# EAGLE board Selectric (EAGLE 7.7.0)
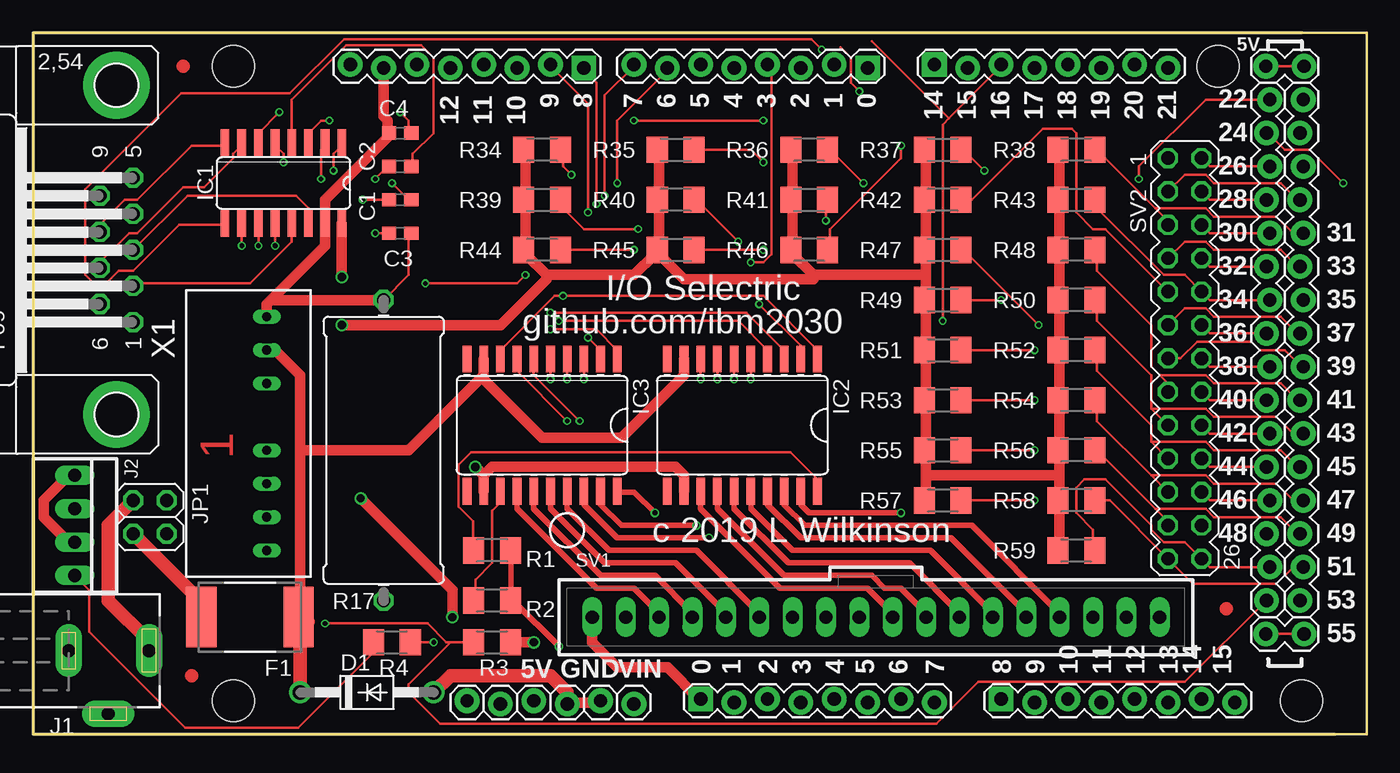
[diagram p0: board, top side]
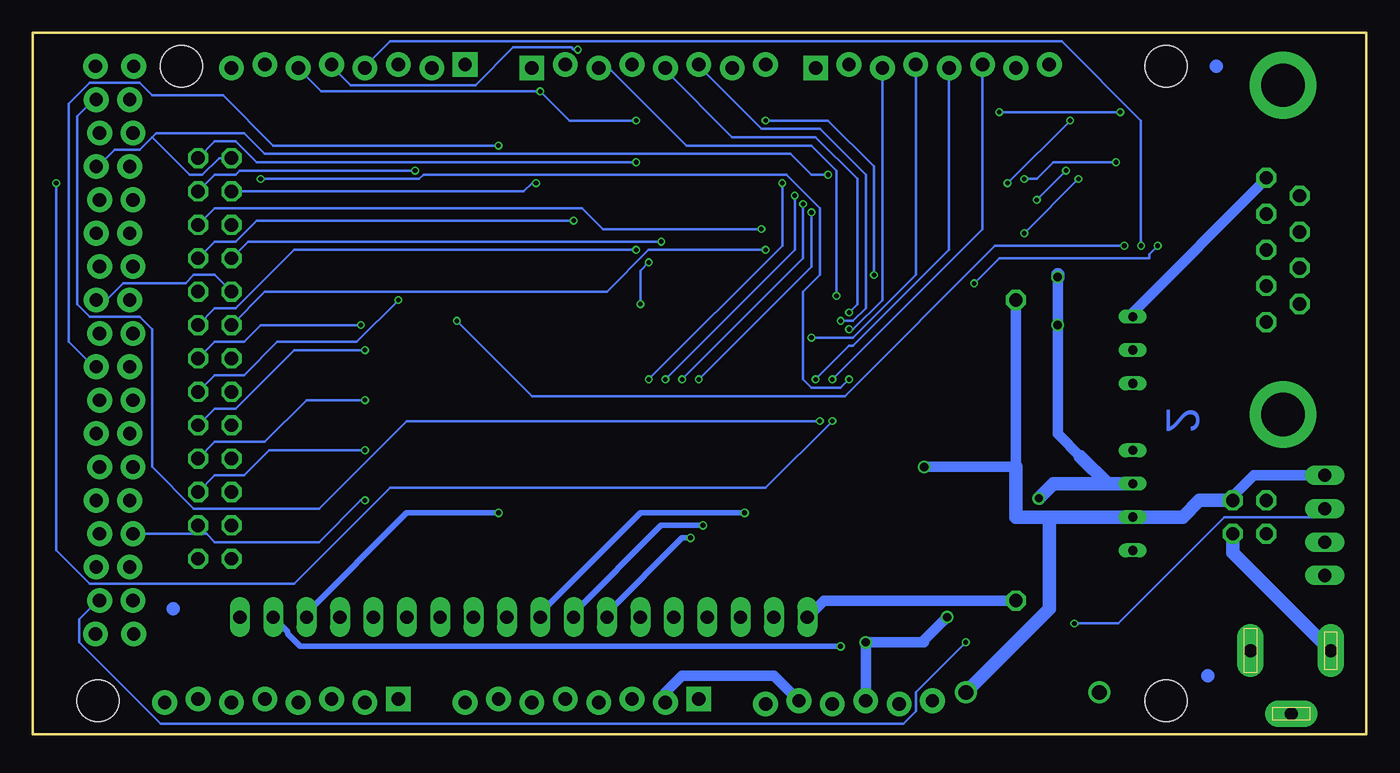
[diagram p1: board, bottom side, seen from below]

Size 101.47 x 53.34 mm. Coordinates in mm from the lower left corner, seen from the top.
Outline: 101.47,53.34 0,53.34 0,0 101.47,0 101.47,53.34
Copper layers (1*16): Top 0.018mm / dielectric 1.55mm / Bottom 0.018mm
Design rules "eC_2Layer_PClass6_BaseCopperO18_eCDefault": minimum track width 0.15mm, minimum drill 0.35mm, track to track 0.15mm, track to pad 0.15mm, pad to pad 0.15mm, via to via 0.15mm, smd to smd 0mil, copper to edge 0.25mm, drill to drill 0.35mm, minimum pad ring 0.175mm, minimum via ring 0.125mm, stop-mask expansion 0mil, vias tented up to drill 0.45mm, thermal gap 0.2mm
Net classes: 0 default: width 0.203 mm, drill 0.254 mm, clearance 0.203 mm; 1 supplyIn: width 0.813 mm, drill 0.635 mm, clearance 0.381 mm; 2 hsd: width 0.406 mm, drill 0.381 mm, clearance 0.381 mm
Holes 3.2 mm at 15.24,50.8 15.24,2.54 90.17,50.8 96.52,2.54
tKeepout: area 12.7,21 to 15.2,24.8
bKeepout: area 12.7,21 to 15.2,24.8

## Footprints (pad centres in the part's own frame; a part is rotated, then mirrored left to right if it is on the bottom)
C0603 = smd 1.1 x 1: 1 -0.85,0; 2 0.85,0
DO41-10 = drill 1.118: A 5.08,0; C -5.08,0
TRACO_SIP-8 = drill 0.7 long: 1 -8.89,0; 2 -6.35,0; 3 -3.81,0; 5 1.27,0; 6 3.81,0; 7 6.35,0; 8 8.89,0
SMD050F = smd 2.3 x 4.6: 1 -3.7,0; 2 3.7,0
SO16 = smd 0.66 x 2.032: 1 -4.445,-3.073; 2 -3.175,-3.073; 3 -1.905,-3.073; 4 -0.635,-3.073; 5 0.635,-3.073; 6 1.905,-3.073; 7 3.175,-3.073; 8 4.445,-3.073; 9 4.445,3.073; 10 3.175,3.073; 11 1.905,3.073; 12 0.635,3.073; 13 -0.635,3.073; 14 -1.905,3.073; 15 -3.175,3.073; 16 -4.445,3.073
SO20W = smd 0.66 x 2.032: 1 -5.715,-5.029; 2 -4.445,-5.029; 3 -3.175,-5.029; 4 -1.905,-5.029; 5 -0.635,-5.029; 6 0.635,-5.029; 7 1.905,-5.029; 8 3.175,-5.029; 9 4.445,-5.029; 10 5.715,-5.029; 11 5.715,5.029; 12 4.445,5.029; 13 3.175,5.029; 14 1.905,5.029; 15 0.635,5.029; 16 -0.635,5.029; 17 -1.905,5.029; 18 -3.175,5.029; 19 -4.445,5.029; 20 -5.715,5.029
DCJ0303 = drill 1 pad 2 long: 1 0,3.1; 2 4.8,0; 3 0,-3
22-23-2041 = drill 1 long: 1 -3.81,0; 2 -1.27,0; 3 1.27,0; 4 3.81,0
2X02 = drill 1.016 octagon: 1 -1.27,-1.27; 2 -1.27,1.27; 3 1.27,-1.27; 4 1.27,1.27
1X08_LOCK = drill 1.016 pad 1.88 square: 1 0,0.127 | drill 1.016 pad 1.88: 2 2.54,-0.127; 3 5.08,0.127; 4 7.62,-0.127; 5 10.16,0.127; 6 12.7,-0.127; 7 15.24,0.127; 8 17.78,-0.127
1X16_LOCK = drill 1.016 pad 1.88: 1 0,0.127; 2 2.54,-0.127; 3 5.08,0.127; 4 7.62,-0.127; 5 10.16,0.127; 6 12.7,-0.127; 7 15.24,0.127; 8 17.78,-0.127; 9 20.32,0.127; 10 22.86,-0.127; 11 25.4,0.127; 12 27.94,-0.127; 13 30.48,0.127; 14 33.02,-0.127; 15 35.56,0.127; 16 38.1,-0.127
1X06_LOCK = drill 1.016 pad 1.88: 1 0,0; 2 2.54,-0.254; 3 5.08,0; 4 7.62,-0.254; 5 10.16,0; 6 12.7,-0.254
1X02_LOCK = drill 1.016 pad 1.88: 1 -0.178,0; 2 2.718,0
M1206 = smd 1.6 x 2: 1 -1.4,0; 2 1.4,0
0922/22 = drill 1.016 octagon: 1 -11.43,0; 2 11.43,0
70543-18 = drill 1.016 long: 1 -21.59,0; 2 -19.05,0; 3 -16.51,0; 4 -13.97,0; 5 -11.43,0; 6 -8.89,0; 7 -6.35,0; 8 -3.81,0; 9 -1.27,0; 10 1.27,0; 11 3.81,0; 12 6.35,0; 13 8.89,0; 14 11.43,0; 15 13.97,0; 16 16.51,0; 17 19.05,0; 18 21.59,0
MA13-2 = drill 1.016 octagon: 1 -15.24,-1.27; 2 -15.24,1.27; 3 -12.7,-1.27; 4 -12.7,1.27; 5 -10.16,-1.27; 6 -10.16,1.27; 7 -7.62,-1.27; 8 -7.62,1.27; 9 -5.08,-1.27; 10 -5.08,1.27; 11 -2.54,-1.27; 12 -2.54,1.27; 13 0,-1.27; 14 0,1.27; 15 2.54,-1.27; 16 2.54,1.27; 17 5.08,-1.27; 18 5.08,1.27; 19 7.62,-1.27; 20 7.62,1.27; 21 10.16,-1.27; 22 10.16,1.27; 23 12.7,-1.27; 24 12.7,1.27; 25 15.24,-1.27; 26 15.24,1.27
F09HP = drill 1.016 octagon: 1 -5.486,-1.27; 2 -2.743,-1.27; 3 0,-1.27; 4 2.743,-1.27; 5 5.486,-1.27; 6 -4.115,1.27; 7 -1.372,1.27; 8 1.372,1.27; 9 4.115,1.27 | drill 3.302 pad 5.08: G1 -12.522,0; G2 12.522,0

## Placement (x,y rotation side)
C1  100n  [C0603]  27.94,40.64 0 top
C2  100n  [C0603]  27.94,43.18 180 top
C3  100n  [C0603]  27.94,38.1 0 top
C4  100n  [C0603]  27.94,45.72 180 top
D1  1N4004  [DO41-10]  25.4,3.17 0 top
DC1  TMR  [TRACO_SIP-8]  17.78,22.86 270 top
F1  SMD100F  [SMD050F]  16.51,8.89 0 top
IC1  MAX3232ESE  [SO16]  19.05,41.91 180 top
IC2  UDN2982SLW  [SO20W]  53.98,23.5 180 top
IC3  UDN2982SLW  [SO20W]  38.73,23.5 180 top
J1  [DCJ0303]  5.71,6.35 270 top
J2  22-23-2041  [22-23-2041]  3.17,15.88 270 top
JP1  [2X02]  8.89,16.51 270 top
JP3  [1X08_LOCK]  41.91,50.8 180 top
JP4  [1X08_LOCK]  63.5,50.8 180 top
JP5  [1X08_LOCK]  68.58,50.8 0 top
JP6  [1X08_LOCK]  73.66,2.54 0 top
JP7  [1X08_LOCK]  50.8,2.54 0 top
JP8  M16LOCK  [1X16_LOCK]  96.52,10.16 90 top
JP9  M16LOCK  [1X16_LOCK]  93.98,48.26 270 top
JP10  [1X06_LOCK]  33.02,2.54 0 top
JP11  [1X02_LOCK]  93.98,7.62 0 top
JP12  [1X02_LOCK]  93.98,50.8 0 top
R1  10R  [M1206]  34.92,13.97 0 top
R2  10R  [M1206]  34.92,10.16 0 top
R3  220R  [M1206]  34.92,6.99 180 top
R4  220R  [M1206]  27.3,6.99 180 top
R17  1R0  [0922/22]  26.67,21.59 270 top
R34  220R  [M1206]  38.73,44.45 0 top
R35  220R  [M1206]  48.9,44.45 180 top
R36  220R  [M1206]  59.05,44.45 0 top
R37  220R  [M1206]  69.22,44.45 180 top
R38  220R  [M1206]  79.38,44.45 0 top
R39  220R  [M1206]  38.73,40.64 180 top
R40  220R  [M1206]  48.9,40.64 0 top
R41  220R  [M1206]  59.05,40.64 180 top
R42  220R  [M1206]  69.22,40.64 0 top
R43  220R  [M1206]  79.38,40.64 180 top
R44  220R  [M1206]  38.73,36.83 0 top
R45  220R  [M1206]  48.9,36.83 180 top
R46  220R  [M1206]  59.05,36.83 0 top
R47  220R  [M1206]  69.22,36.83 180 top
R48  220R  [M1206]  79.38,36.83 0 top
R49  220R  [M1206]  69.22,33.02 180 top
R50  220R  [M1206]  79.38,33.02 0 top
R51  220R  [M1206]  69.22,29.21 180 top
R52  220R  [M1206]  79.38,29.21 0 top
R53  220R  [M1206]  69.22,25.4 180 top
R54  220R  [M1206]  79.38,25.4 0 top
R55  220R  [M1206]  69.22,21.59 180 top
R56  220R  [M1206]  79.38,21.59 0 top
R57  220R  [M1206]  69.22,17.78 180 top
R58  220R  [M1206]  79.38,17.78 0 top
R59  220R  [M1206]  79.38,13.97 180 top
SV1  C-GRID-18-70543  [70543-18]  64.14,8.89 180 top
SV2  [MA13-2]  87.63,28.57 270 top
U$1  [CIRCLE-1MM-3R]  12.06,4.45 0 top
U$2  [CIRCLE-1MM-3R]  90.81,9.53 0 top
U$3  [CIRCLE-1MM-3R]  11.43,50.8 0 top
X1  [F09HP]  6.35,36.83 90 top

## Library data of the parts
C1-C4 R1-R4 R17 R34-R59 = rcl
D1 = diode
DC1 = traco_tmr
F1 = switch-raychem
IC1 = maxim; MF: MAXIM; MPN: MAX3232ESE; OC_FARNELL: 9725539; OC_NEWARK: 79C3880
IC2 IC3 = uln-udn
J1 = con-jack; OC_FARNELL: unknown; OC_NEWARK: unknown
J2 = con-molex; MF: MOLEX; MPN: 22-23-2041; OC_FARNELL: 1462920; OC_NEWARK: 38C0355
JP1 = pinhead
JP3-JP12 = SparkFun
SV1 = con-molex; OC_FARNELL: unknown; OC_NEWARK: unknown
SV2 = con-lstb; OC_FARNELL: unknown; OC_NEWARK: unknown
U$1-U$3 = fiducial
X1 = con-subd; OC_FARNELL: unknown; OC_NEWARK: unknown

## Nets
3.3: JP10.2
5V@1: JP12.1 JP12.2
A2: JP7.3
A3: JP7.4
A4: JP7.5
A5: JP7.6
A6: JP7.7
A7: JP7.8
A8: JP6.1
A9: JP6.2
A10: JP6.3
A11: JP6.4
A12: JP6.5
A13: JP6.6
A14: JP6.7
A15: JP6.8
AREF: JP3.8
CTS: IC1.8 X1.8
D2: IC2.1 IC3.8 JP4.3
D3: IC2.2 JP4.4
D4: IC2.3 JP4.5
D5: IC2.4 JP4.6
D6: IC2.5 JP4.7
D7: IC2.6 JP4.8
D8: IC2.7 JP3.1
D9: IC2.8 JP3.2
D10: IC3.1 JP3.3
D11: IC3.2 JP3.4
D12: IC3.3 JP3.5
D13: IC3.4 JP3.6
D14: JP5.8
D15: JP5.7
D22: IC3.5 JP9.1
D23: IC3.6 JP8.16
D24: IC3.7 JP9.2
D25: JP8.15
D26: JP9.3 R35.1 SV2.2
D27: JP8.14 R34.2 SV2.1
D28: JP9.4 R37.1 SV2.4
D29: JP8.13 R36.2 SV2.3
D30: JP9.5 R39.1 SV2.6
D31: JP8.12 R38.2 SV2.5
D32: JP9.6 R41.1 SV2.8
D33: JP8.11 R40.2 SV2.7
D34: JP9.7 R43.1 SV2.10
D35: JP8.10 R42.2 SV2.9
D36: JP9.8 R45.1 SV2.12
D37: JP8.9 R44.2 SV2.11
D38: JP9.9 R47.1 SV2.14
D39: JP8.8 R46.2 SV2.13
D40: JP9.10 R49.1 SV2.16
D41: JP8.7 R48.2 SV2.15
D42: JP9.11 R51.1 SV2.18
D43: JP8.6 R50.2 SV2.17
D44: JP9.12 R53.1 SV2.20
D45: JP8.5 R52.2 SV2.19
D46: JP9.13 R55.1 SV2.22
D47: JP8.4 R54.2 SV2.21
D48: JP9.14 R57.1 SV2.24
D49: JP8.3 R56.2 SV2.23
D50: JP9.15 R59.1 SV2.26
D51: JP8.2 R58.2 SV2.25
D52: J2.2 JP9.16 R3.2
D53: JP8.1 R4.1
GND [supplyIn]: C3.2 C4.2 D1.A DC1.1 DC1.7 IC1.15 IC2.12 IC3.12 J2.1 J2.3 JP1.2 JP3.7 JP7.2 JP10.4 JP10.5 R17.1 X1.5
HSD1 [hsd]: R1.2 R2.2 SV1.2
HSD2 [hsd]: IC2.19 SV1.3
HSD3 [hsd]: IC2.18 SV1.4
HSD4 [hsd]: IC2.17 SV1.5
HSD5 [hsd]: IC2.16 SV1.6
HSD6 [hsd]: IC2.15 SV1.7
HSD7 [hsd]: IC2.14 SV1.8
HSD8 [hsd]: IC2.13 SV1.9
HSD9 [hsd]: IC3.20 SV1.10
HSD10 [hsd]: IC3.19 SV1.11
HSD11 [hsd]: IC3.18 SV1.12
HSD12 [hsd]: IC3.17 SV1.13
HSD13 [hsd]: IC3.16 SV1.14
HSD14 [hsd]: IC3.15 SV1.15
HSD15 [hsd]: IC3.14 SV1.16
HSD16 [hsd]: SV1.17
HSDCOM [supplyIn]: D1.C DC1.2 F1.2 IC2.9 IC3.9
HSDRET [supplyIn]: JP7.1 R17.2 SV1.18
IN_GND: JP11.1 JP11.2
LED+: J2.4 R4.2
N$1: C1.1 IC1.1
N$2: C2.1 IC1.4
N$3: C1.2 IC1.3
N$4: C2.2 IC1.5
N$5: IC3.13 R2.1
N$6: C3.1 IC1.2
N$7: C4.1 IC1.6
N$8: IC2.20 R1.1
N$23 [supplyIn]: J1.3 JP1.4
N$24 [supplyIn]: J1.1 JP1.1
N$42 [supplyIn]: F1.1 JP1.3
RES: JP10.1
RTS: IC1.7 X1.7
RX0: JP4.1
RX1: IC1.12 JP5.3
RX2: IC1.9 JP5.5
RXD: IC1.13 X1.2
SCL: JP5.1
SDA: JP5.2
TX0: JP4.2
TX1: IC1.11 JP5.4
TX2: IC1.10 JP5.6
TXD: IC1.14 X1.3
VCC [supplyIn]: DC1.6 IC1.16 JP10.3 R3.1 R34.1 R35.2 R36.1 R37.2 R38.1 R39.2 R40.1 R41.2 R42.1 R43.2 R44.1 R45.2 R46.1 R47.2 R48.1 R49.2 R50.1 R51.2 R52.1 R53.2 R54.1 R55.2 R56.1 R57.2 R58.1 R59.2
VIN: JP10.6

## Tracks (layer width: path | path; a pad name or v marks a point on that pad's centre or on a via)
5V@1
  Top 0.203: JP12.2 JP12.1
CTS
  Top 0.203: X1.8 5.08,38.73 6.99,40.64 7.94,40.64 12.06,44.77 14.61,44.77 IC1.8
D2  (via drill 0.35)
  Top 0.203: IC3.8 35.56,29.21 39.69,33.34 v40.32,33.34 55.56,33.34 59.69,29.21 IC2.1
  Bottom 0.203: v40.32,33.34 40.32,42.86 42.23,44.77 51.75,44.77 57.47,50.48 58.42,50.48 JP4.3
D3  (via drill 0.35)
  Top 0.203: IC2.2 58.42,29.53 v55.24,32.7 | v54.61,35.88 55.56,35.88 56.2,36.51 56.2,50.48 55.88,50.8 JP4.4
  Bottom 0.203: v55.24,32.7 55.24,35.24 v54.61,35.88
D4  (via drill 0.35)
  Top 0.203: IC2.3 57.15,29.21 54.29,32.07 v39.37,32.07
  Bottom 0.203: v39.37,32.07 38.73,32.7 38.73,42.23 41.91,45.4 48.26,45.4 53.34,50.48 JP4.5
D5  (via drill 0.35)
  Top 0.203: IC2.4 55.88,29.21 53.66,31.43 v40.01,31.43
  Bottom 0.203: v40.01,31.43 39.05,31.43 38.1,32.38 38.1,42.55 41.59,46.04 46.04,46.04 50.8,50.8 JP4.6
D6  (via drill 0.35)
  Top 0.203: v54.61,26.99 IC2.5 | v44.45,41.91 44.45,46.67 48.26,50.48 JP4.7
  Bottom 0.203: v54.61,26.99 44.45,37.15 v44.45,41.91
D7  (via drill 0.35)
  Top 0.203: v43.5,40.96 43.5,48.58 45.72,50.8 JP4.8 | v53.34,26.99 IC2.6
  Bottom 0.203: v53.34,26.99 43.5,36.83 v43.5,40.96
D8  (via drill 0.35)
  Top 0.203: v52.07,26.99 IC2.7 | v42.86,40.32 42.86,49.53 41.91,50.48 JP3.1
  Bottom 0.203: v52.07,26.99 42.86,36.2 v42.86,40.32
D9  (via drill 0.35)
  Top 0.203: v50.8,26.99 IC2.8 | v42.23,39.69 42.23,47.94 39.37,50.8 JP3.2
  Bottom 0.203: v50.8,26.99 42.23,35.56 v42.23,39.69
D10  (via drill 0.35)
  Top 0.203: IC3.1 44.45,29.21 42.86,30.8 v39.37,30.8
  Bottom 0.203: v39.37,30.8 39.05,30.8 36.83,33.02 JP3.3
D11  (via drill 0.35)
  Top 0.203: IC3.2 43.18,29.21 v42.23,30.16
  Bottom 0.203: v42.23,30.16 39.05,30.16 34.29,34.92 JP3.4
D12  (via drill 0.35)
  Top 0.203: v41.91,26.99 IC3.3
  Bottom 0.203: v41.91,26.99 39.37,29.53 39.05,29.53 31.75,36.83 JP3.5
D13  (via drill 0.35)
  Top 0.203: v40.64,26.99 IC3.4
  Bottom 0.203: v40.64,26.99 29.21,38.42 JP3.6
D22  (via drill 0.35)
  Top 0.203: v39.37,26.99 IC3.5 | v84.14,42.23 84.14,43.18 89.22,48.26 JP9.1
  Bottom 0.203: v39.37,26.99 40.01,26.35 42.23,26.35 42.86,26.99 42.86,33.66 41.59,34.92 41.59,40.01 44.13,42.55 71.75,42.55 72.07,42.23 v84.14,42.23
D23  (via drill 0.35)
  Top 0.203: IC3.6 38.1,27.3 v41.59,23.81
  Bottom 0.203: v41.59,23.81 73.03,23.81 79.69,17.14 89.22,17.14 92.39,20.32 92.39,30.8 93.34,31.75 97.16,31.75 98.11,32.7 98.11,46.99 96.84,48.26 JP8.16
D24  (via drill 0.35)
  Top 0.203: IC3.7 36.83,27.62 v40.64,23.81 | v99.69,41.91 97.16,44.45 95.25,44.45 93.98,45.72 JP9.2
  Bottom 0.203: v40.64,23.81 45.72,18.73 74.3,18.73 81.6,11.43 97.16,11.43 99.69,13.97 v99.69,41.91
D26  (via drill 0.35)
  Top 0.203: R35.1 54.61,44.45 v55.56,43.5 | JP9.3 89.53,43.18 SV2.2
  Bottom 0.203: v55.56,43.5 84.45,43.5 86.04,45.09 87.63,45.09 SV2.2
D27  (via drill 0.35)
  Top 0.203: v40.96,42.55 40.32,43.18 40.32,44.45 R34.2
  Bottom 0.203: v40.96,42.55 42.23,42.55 43.81,44.13 83.82,44.13 85.41,45.72 92.08,45.72 92.39,45.4 | 92.39,45.4 93.34,44.45 95.25,44.45 96.52,43.18 JP8.14 | SV2.1 87.31,43.81 88.58,42.55 89.53,42.55 92.39,45.4
D28  (via drill 0.35)
  Top 0.203: v72.39,42.86 70.8,44.45 R37.1 | JP9.4 89.53,40.64 SV2.4
  Bottom 0.203: v72.39,42.86 85.72,42.86 86.04,42.55 87.63,42.55 SV2.4
D29  (via drill 0.35)
  Top 0.203: v63.18,41.91 60.64,44.45 R36.2 | SV2.3 87.63,42.55 89.22,42.55 89.85,41.91 94.93,41.91 96.2,40.64 JP8.13
  Bottom 0.203: v63.18,41.91 63.5,41.91 64.14,41.27 SV2.3
D30  (via drill 0.35)
  Top 0.203: v46.04,38.42 41.91,38.42 40.32,40.01 40.32,40.64 R39.1 | JP9.5 89.53,38.1 SV2.6
  Bottom 0.203: v46.04,38.42 58.1,38.42 59.69,40.01 87.63,40.01 SV2.6
D31
  Top 0.203: 85.41,40.01 86.36,39.05 SV2.5 | 85.41,40.01 80.96,44.45 R38.2 | JP8.12 95.89,38.1 94.61,39.37 89.85,39.37 89.22,40.01 85.41,40.01
D32  (via drill 0.35)
  Top 0.203: v60.33,39.05 60.33,40.64 R41.1 | JP9.6 89.53,35.56 SV2.8
  Bottom 0.203: v60.33,39.05 84.45,39.05 86.04,37.47 87.63,37.47 SV2.8
D33  (via drill 0.35)
  Top 0.203: v53.66,37.47 50.48,40.64 R40.2 | SV2.7 87.63,37.47 89.22,37.47 89.85,36.83 94.93,36.83 96.2,35.56 JP8.11
  Bottom 0.203: v53.66,37.47 85.09,37.47 SV2.7
D34
  Top 0.203: R43.1 80.96,40.64 80.96,40.01 86.04,34.92 87.63,34.92 SV2.10 89.53,33.02 JP9.7
D35
  Top 0.203: R42.2 71.44,40.64 76.83,46.04 79.06,46.04 79.38,45.72 79.38,39.69 80.64,38.42 81.6,38.42 SV2.9
  Bottom 0.203: JP8.10 95.89,33.02 94.61,34.29 89.85,34.29 89.22,34.92 87.63,34.92 SV2.9
D36  (via drill 0.35)
  Top 0.203: v55.56,36.83 R45.1 | JP9.8 89.53,30.48 SV2.12
  Bottom 0.203: v55.56,36.83 81.6,36.83 86.04,32.38 87.63,32.38 SV2.12
D37  (via drill 0.35)
  Top 0.203: v45.72,36.83 R44.2 | SV2.11 87.63,32.38 89.22,32.38 89.85,31.75 94.93,31.75 96.2,30.48 JP8.9
  Bottom 0.203: v45.72,36.83 54.61,36.83 57.78,33.66 83.82,33.66 SV2.11
D38  (via drill 0.35)
  Top 0.203: v76.52,31.11 70.8,36.83 R47.1 | JP9.9 89.53,27.94 SV2.14
  Bottom 0.203: v76.52,31.11 84.14,31.11 85.41,29.84 87.63,29.84 SV2.14
D39  (via drill 0.35)
  Top 0.203: v66.04,44.77 66.04,43.81 60.64,38.42 60.64,36.83 R46.2 | SV2.13 87.31,28.57 88.58,29.84 92.71,29.84 93.34,29.21 95.25,29.21 96.52,27.94 JP8.8
  Bottom 0.203: v66.04,44.77 83.19,44.77 87,48.58 92.39,48.58 93.34,49.53 97.16,49.53 98.74,47.94 98.74,29.84 96.84,27.94 JP8.8
D40  (via drill 0.35)
  Top 0.203: v73.66,33.02 R49.1 | JP9.10 89.53,25.4 SV2.16
  Bottom 0.203: v73.66,33.02 76.83,29.84 82.87,29.84 85.41,27.3 87.63,27.3 SV2.16
D41
  Top 0.203: 85.72,27.3 86.36,26.67 SV2.15 | 85.72,27.3 85.09,27.94 85.09,31.11 80.96,35.24 80.96,36.83 R48.2 | 85.72,27.3 89.22,27.3 89.85,26.67 94.93,26.67 96.2,25.4 JP8.7
D42  (via drill 0.35)
  Top 0.203: v76.2,29.21 R51.1 | JP9.11 89.53,22.86 SV2.18
  Bottom 0.203: v76.2,29.21 81.6,29.21 86.04,24.77 87.63,24.77 SV2.18
D43
  Top 0.203: 85.09,24.77 85.09,27.3 80.96,31.43 80.96,33.02 R50.2 | SV2.17 85.09,24.77 | JP8.6 95.89,22.86 94.61,24.13 89.85,24.13 89.22,24.77 85.09,24.77
D44  (via drill 0.35)
  Top 0.203: v76.2,25.4 R53.1 | JP9.12 89.53,20.32 SV2.20
  Bottom 0.203: v76.2,25.4 80.64,25.4 83.82,22.23 87.63,22.23 SV2.20
D45
  Top 0.203: 85.09,22.23 85.09,23.5 80.96,27.62 80.96,29.21 R52.2 | SV2.19 85.09,22.23 | 85.09,22.23 89.22,22.23 89.85,21.59 94.93,21.59 96.2,20.32 JP8.5
D46  (via drill 0.35)
  Top 0.203: v76.2,21.59 R55.1 | JP9.13 89.53,17.78 SV2.22
  Bottom 0.203: v76.2,21.59 83.5,21.59 85.41,19.68 87.63,19.68 SV2.22
D47
  Top 0.203: SV2.21 85.09,19.68 | 85.09,19.68 80.96,23.81 80.96,25.4 R54.2 | JP8.4 95.89,17.78 94.61,19.05 89.85,19.05 89.22,19.68 85.09,19.68
D48  (via drill 0.35)
  Top 0.203: v76.2,17.78 R57.1
  Bottom 0.203: v76.2,17.78 76.52,17.78 79.69,14.61 87.63,14.61 88.27,15.24 | SV2.24 88.27,15.24 | 88.27,15.24 JP9.14
D49
  Top 0.203: 85.41,17.14 86.36,16.19 SV2.23 | 85.41,17.14 80.96,21.59 R56.2 | 85.41,17.14 89.22,17.14 89.85,16.51 94.93,16.51 96.2,15.24 JP8.3
D50
  Top 0.203: R59.1 80.64,13.97 80.64,15.56 79.38,16.83 79.38,18.73 80.01,19.37 81.6,19.37 85.09,15.88 85.09,15.56 86.04,14.61 87.63,14.61 SV2.26 89.53,12.7 JP9.15
D51
  Top 0.203: R58.2 81.92,17.78 SV2.25 88.27,11.43 94.61,11.43 95.89,12.7 JP8.2
D52  (via drill 0.35)
  Top 0.203: 31.75,6.99 31.43,6.99 30,8.41 v22.23,8.41 | 31.75,6.99 R3.2 | JP9.16 93.82,10.16 87.63,3.97 71.91,3.97 68.74,0.79 30.96,0.79 28.57,3.17 28.57,3.81 31.75,6.99
  Bottom 0.203: v22.23,8.41 18.89,8.41 10.79,16.51 3.81,16.51 J2.2
D53  (via drill 0.35)
  Top 0.203: v30.48,6.99 R4.1
  Bottom 0.203: v30.48,6.99 34.29,3.17 34.29,1.75 35.24,0.79 91.76,0.79 97.95,6.99 97.95,8.73 96.52,10.16 JP8.1
GND  (via drill 0.64)
  Top 0.203: C3.2 28.57,37.88 28.57,34.92 R17.1
  Top 0.813: 17.78,31.8 DC1.1 17.78,32.7 18.26,33.18 | JP10.5 43.02,2.38 40.64,2.38 JP10.4 | 34.29,19.68 IC3.12 | 34.29,19.68 34.92,20.32 48.9,20.32 49.53,19.68 IC2.12 | 34.29,19.68 v33.66,20.32 | JP3.7 26.67,46.99 26.99,46.67 26.99,45.72 C4.2 26.99,45.4 22.23,40.64 IC1.15 22.23,37.15 18.26,33.18 | R17.1 18.41,33.02 18.26,33.18 | J2.3 2.7,14.61 0.79,16.51 0.79,17.78 2.7,19.68 J2.1
  Top 1.016: 40.64,2.38 40.64,3.17 39.37,4.45 31.75,4.45 D1.A
  Bottom 0.813: JP7.2 53.34,3.17 52.07,4.45 45.09,4.45 JP10.5 | v33.66,20.32 26.67,20.32 R17.1 | DC1.1 17.78,32.07 7.62,42.23 X1.5 | J2.1 8.57,19.68 10.32,17.94 JP1.2
  Bottom 1.016: 26.67,20.32 26.67,16.51 24.13,16.51 | 24.13,16.51 DC1.7 13.97,16.51 12.7,17.78 JP1.2 | D1.A 24.13,9.53 24.13,16.51
HSD1  (via drill 0.38)
  Top 0.406: R1.2 36.35,13.97 36.35,10.16 R2.2 36.51,10.16 v40.01,6.67
  Bottom 0.406: SV1.2 82.07,7.78 82.07,7.62 81.12,6.67 v40.01,6.67
HSD2  (via drill 0.38)
  Top 0.406: IC2.19 58.42,17.46 59.05,16.83 v66.04,16.83
  Bottom 0.406: v66.04,16.83 73.03,16.83 80.64,9.21 SV1.3
HSD3
  Top 0.406: IC2.18 57.15,17.46 58.74,15.88 71.44,15.88 78.11,9.21 SV1.4
HSD4
  Top 0.406: IC2.17 55.88,17.46 58.42,14.92 69.85,14.92 75.56,9.21 SV1.5
HSD5
  Top 0.406: IC2.16 54.61,17.14 57.78,13.97 68.26,13.97 73.03,9.21 SV1.6
HSD6
  Top 0.406: IC2.15 53.34,17.14 57.47,13.02 66.67,13.02 70.48,9.21 SV1.7
HSD7
  Top 0.406: IC2.14 52.07,17.14 57.15,12.06 63.82,12.06 64.77,11.11 66.04,11.11 67.94,9.21 SV1.8
HSD8
  Top 0.406: IC2.13 50.8,17.14 56.83,11.11 63.5,11.11 65.41,9.21 SV1.9
HSD9  (via drill 0.38)
  Top 0.406: v47.31,16.83 45.72,18.41 44.45,18.41 IC3.20
  Bottom 0.406: v47.31,16.83 55.24,16.83 62.87,9.21 SV1.10
HSD10  (via drill 0.38)
  Top 0.406: IC3.19 43.18,17.46 44.77,15.88 v50.48,15.88
  Bottom 0.406: v50.48,15.88 53.66,15.88 60.33,9.21 SV1.11
HSD11  (via drill 0.38)
  Top 0.406: IC3.18 41.91,17.46 44.45,14.92 v51.44,14.92
  Bottom 0.406: v51.44,14.92 52.07,14.92 57.78,9.21 SV1.12
HSD12
  Top 0.406: IC3.17 40.64,17.14 43.81,13.97 50.48,13.97 55.24,9.21 SV1.13
HSD13
  Top 0.406: 52.7,9.05 SV1.14 52.7,9.21 48.9,13.02 43.5,13.02 39.37,17.14 IC3.16
HSD14
  Top 0.406: 50.16,9.05 SV1.15 50.16,9.21 47.31,12.06 43.18,12.06 38.1,17.14 IC3.15
HSD15
  Top 0.406: 47.62,9.05 SV1.16 47.62,9.21 45.72,11.11 42.86,11.11 36.83,17.14 IC3.14
HSDCOM
  Top 0.813: F1.2 20.32,8.89 20.32,8.26 F1.2 | 20.69,8.46 F1.2 | 21.03,8.53 F1.2 | 20.32,21.59 20.32,27.3 18.41,29.21 17.72,29.15 17.83,29.15 DC1.2 | 20.32,21.59 20.32,9 F1.2 | 34.29,27.3 34.29,26.99 38.73,22.54 44.77,22.54 49.53,27.3 IC2.9 | 34.29,27.3 IC3.9 | 34.29,27.3 28.57,21.59 20.32,21.59
  Top 1.016: 20.32,8.26 D1.C
HSDRET
  Top 0.813: JP7.1 50.67,2.67 48.26,5.08 44.45,5.08 42.55,6.99 SV1.18
  Bottom 0.813: R17.2 41.27,10.16 SV1.18
IN_GND
  Top 0.203: JP11.2 JP11.1
LED+
  Top 0.203: J2.4 4.29,10.95 4.29,7.78 11.59,0.48 20.16,0.48 25.88,6.19 25.88,6.99 R4.2
N$1  (via drill 0.35)
  Top 0.203: v25.08,40.64 C1.1 | v22.86,42.86 22.86,44.13 23.5,44.77 IC1.1
  Bottom 0.203: v22.86,42.86 v25.08,40.64
N$2
  Top 0.203: IC1.4 19.68,48.26 23.81,52.39 29.53,52.39 30.48,51.44 30.48,45.72 28.89,44.13 28.89,43.18 C2.1
N$3  (via drill 0.35)
  Top 0.203: v27.3,41.91 28.57,40.64 C1.2 | v22.54,46.67 21.91,46.67 20.95,45.72 IC1.3
  Bottom 0.203: v22.54,46.67 v27.3,41.91
N$4  (via drill 0.35)
  Top 0.203: v26.04,42.23 26.99,43.18 C2.2 | v19.05,43.5 19.05,44.13 18.41,44.77 IC1.5
  Bottom 0.203: v26.04,42.23 25.08,42.23 23.81,43.5 v19.05,43.5
N$5
  Top 0.203: IC3.13 35.56,17.62 34.92,16.99 34.92,13.02 33.66,11.75 33.66,10.16 R2.1
N$6  (via drill 0.35)
  Top 0.203: v26.04,38.1 C3.1 | v21.91,42.23 21.91,44.45 22.23,44.77 IC1.2
  Bottom 0.203: v21.91,42.23 v26.04,38.1
N$7  (via drill 0.35)
  Top 0.203: v27.94,47.31 28.57,46.67 28.57,45.72 C4.1 | v18.73,47.31 17.14,45.72 IC1.6
  Bottom 0.203: v18.73,47.31 v27.94,47.31
N$8
  Top 0.203: IC2.20 59.69,19.37 57.63,21.43 33.34,21.43 32.38,20.48 32.38,17.3 33.5,16.19 33.5,13.97 R1.1
N$23
  Bottom 1.016: JP1.4 10.16,13.79 J1.3
N$24
  Top 1.016: J1.1 8.81,7.06 5.71,10.16 5.71,15.88 JP1.1
N$42
  Top 1.016: JP1.3 12.7,10.16 12.7,9 F1.1
RTS
  Top 0.203: X1.7 5.08,35.88 7.3,38.1 7.94,38.1 11.43,41.59 13.02,41.59 15.24,43.81 15.24,44.13 15.88,44.77 IC1.7
RX1  (via drill 0.35)
  Top 0.203: v69.22,31.43 69.22,46.35 69.69,46.83 | 69.69,46.83 73.66,50.8 JP5.3 | 69.69,46.83 63.82,52.7 | v18.41,37.15 IC1.12
  Bottom 0.203: v18.41,37.15 28.26,37.15 39.69,25.72 63.5,25.72 v69.22,31.43
RX2  (via drill 0.35)
  Top 0.203: v60.01,52.07 59.21,52.86 23.65,52.86 19.53,48.74 11.27,48.74 3.97,41.43 3.97,34.92 4.6,34.29 5.56,34.29 6.51,35.24 7.62,35.24 11.11,38.73 14.61,38.73 IC1.9
  Bottom 0.203: v60.01,52.07 60.33,52.07 60.48,52.23 64.93,52.23 67.79,49.37 77.31,49.37 78.74,50.8 JP5.5
RXD
  Top 0.203: IC1.13 19.68,37.47 16.51,34.29 7.62,34.29 X1.2
TX1  (via drill 0.35)
  Top 0.203: v17.14,37.15 IC1.11
  Bottom 0.203: JP5.4 76.2,50.8 74.3,52.7 23.18,52.7 17.14,46.67 v17.14,37.15
TX2  (via drill 0.35)
  Top 0.203: 61.44,52.23 62.23,51.44 62.23,49.53 v62.87,48.9 | v15.88,37.15 IC1.10 | v37.47,34.92 36.83,34.29 v29.84,34.29 | v55.56,46.67 v45.72,46.67
  Bottom 0.203: JP5.6 81.28,50.64 79.53,48.9 v62.87,48.9 60.64,46.67 v55.56,46.67 | v37.47,34.92 37.47,43.18 40.96,46.67 v45.72,46.67 | v15.88,37.15 16.51,36.51 16.51,36.2 27.94,36.2 v29.84,34.29
TXD
  Top 0.203: IC1.14 20.95,40.01 20,40.96 11.75,40.96 X1.3
VCC  (via drill 0.64)
  Top 0.813: R59.2 78.11,13.97 78.11,17.78 R58.1 78.11,18.1 78.11,19.68 | 78.11,19.68 78.11,21.59 R56.1 78.11,21.91 78.11,25.4 R54.1 78.11,25.72 78.11,29.21 R52.1 78.11,29.53 78.11,33.02 R50.1 78.11,33.34 78.11,36.83 R48.1 78.11,37.15 78.11,40.64 R43.2 78.11,40.96 78.11,44.45 R38.1 | R34.1 37.47,44.45 37.47,40.96 R39.2 37.47,40.64 37.47,36.83 R44.1 37.47,36.51 39.05,34.92 | R45.2 47.62,36.83 47.62,40.64 R40.1 47.62,40.96 47.62,44.45 R35.2 | 39.05,34.92 45.72,34.92 47.31,36.51 R45.2 | R36.1 57.78,44.45 57.78,40.96 R41.2 57.78,40.64 57.78,36.83 R46.1 57.78,36.51 59.37,34.92 | 67.94,19.68 67.94,21.59 R55.2 67.94,21.91 67.94,25.4 R53.2 67.94,25.72 67.94,29.21 R51.2 67.94,29.53 67.94,33.02 R49.2 67.94,33.34 67.94,34.92 | 67.94,19.68 67.94,17.78 R57.2 | 67.94,34.92 67.94,36.83 R47.2 67.94,37.15 67.94,40.64 R42.1 67.94,40.96 67.94,44.45 R37.2 | 67.94,34.92 59.37,34.92 | R45.2 47.62,36.51 49.53,34.61 59.37,34.61 59.37,34.92 | 67.94,19.68 78.11,19.68 | v23.5,34.77 IC1.16 | v38.1,6.99 R3.1 | v24.92,17.94 31.91,10.95 v31.91,8.89 | 39.05,34.92 39.05,34.61 35.56,31.11 v23.5,31.11
  Bottom 0.813: 21.75,21.11 23.5,22.86 v23.5,31.11 v23.5,34.77 | JP10.3 v38.1,6.99 33.66,6.99 33.66,7.14 v31.91,8.89
  Bottom 1.016: 21.75,21.11 19.68,19.05 DC1.6 23.81,19.05 v24.92,17.94 | v23.5,34.77 23.5,34.92

## Text on the board
Top: 1
Bottom: 2
tPlace: 5V | 9 | 8 | 7 | 6 | 5 | 4 | 3 | 2 | 1 | 0 | 22 | 14 | 15 | 16 | 17 | 18 | 19 | 20 | 21 | 12 | 11 | 10 | 24 | 26 | 28 | 30 | 31 | 32 | 33 | 34 | 35 | 36 | 37 | 38 | 39 | 40 | 41 | 42 | 43 | 44 | 45 | 46 | 47 | 48 | 49 | 51 | 53 | 55 | 0 | 1 | 2 | 3 | 4 | 5 | 6 | 7 | 8 | 9 | 10 | 11 | 12 | 13 | 14 | 15 | 5V | GND | VIN
tNames: I/O Selectric | github.com/ibm2030 | c 2019 L Wilkinson